# EAGLE board TEST1 (EAGLE 6.0)
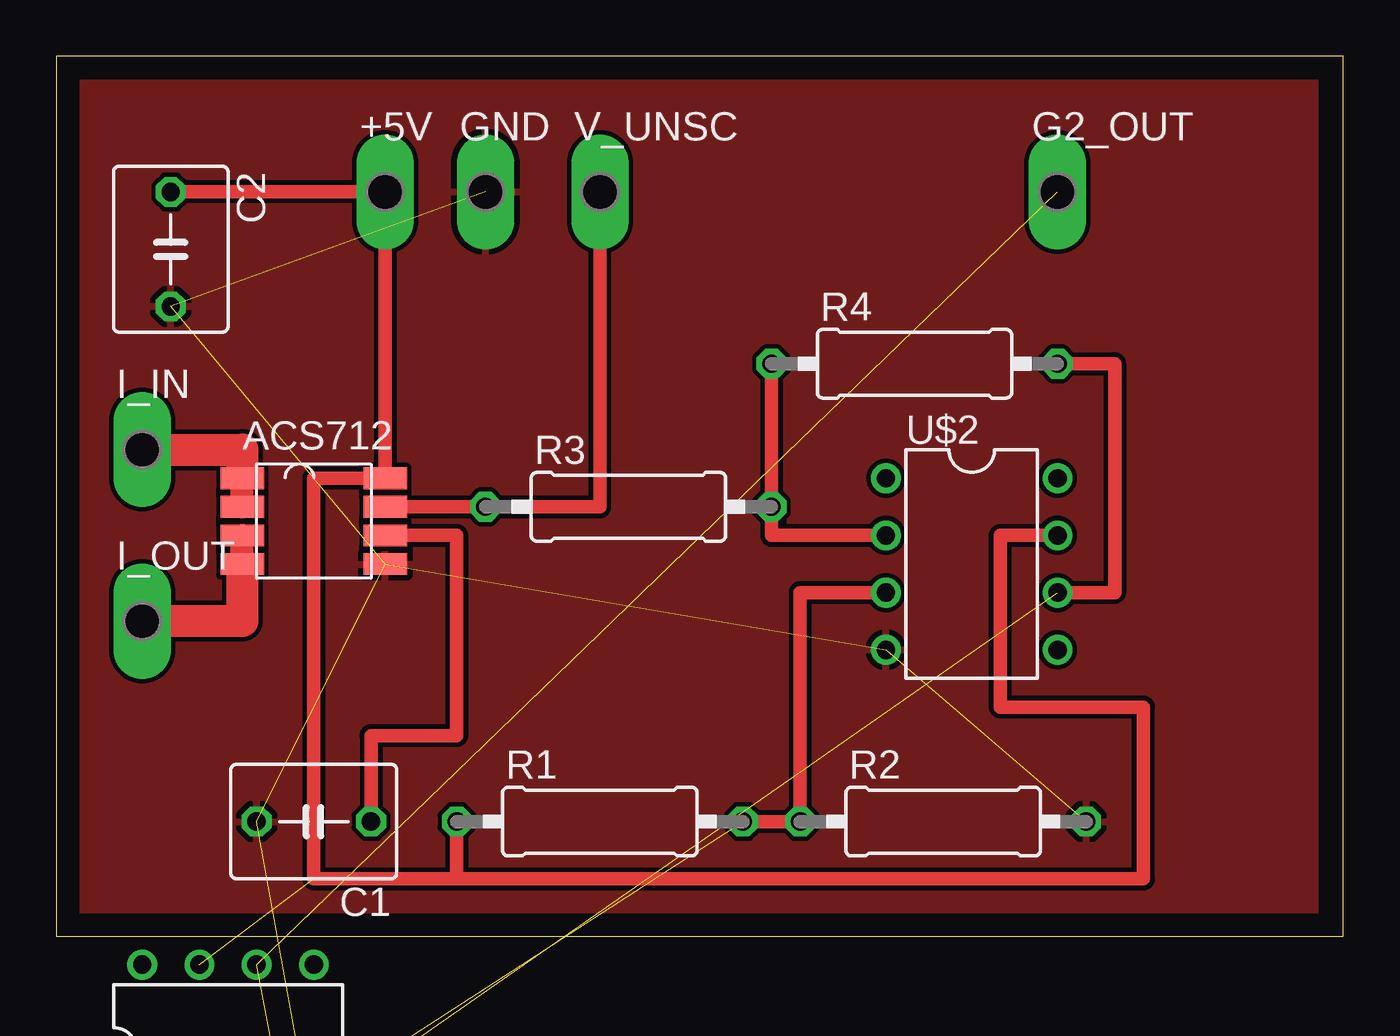
[diagram p0: board, top side]

Size 57.13 x 39.04 mm. Coordinates in mm from the lower left corner, seen from the top.
Outline: 0,0 57.13,0 57.13,39.04 0,39.04 0,0
Copper layers (1*16): Top 0.035mm / dielectric 1.5mm / Bottom 0.035mm
Design rules: minimum track width 10mil, minimum drill 24mil, track to track 8mil, track to pad 8mil, pad to pad 8mil, via to via 8mil, smd to smd 8mil, copper to edge 40mil, drill to drill 8mil, minimum pad ring 10mil, minimum via ring 8mil, stop-mask expansion 4mil, vias tented up to drill 0mil, thermal gap 10mil

## Footprints (pad centres in the part's own frame; a part is rotated, then mirrored left to right if it is on the bottom)
P1-17Y = drill 1.702 pad 2.121 long: TP 0,0
C050-050X075 = drill 0.813 octagon: 1 -2.54,0; 2 2.54,0
0309/12 = drill 0.813 octagon: 1 -6.35,0; 2 6.35,0
SOIC8 = smd 1.93 x 0.965: 1 -4.445,1.27; 2 -4.445,0; 3 -4.445,-1.27; 4 -4.445,-2.54; 5 1.905,-2.54; 6 1.905,-1.27; 7 1.905,0; 8 1.905,1.27
PDIP8 = drill 0.813 pad 1.27: 1 -3.81,-3.81; 2 -1.27,-3.81; 3 1.27,-3.81; 4 3.81,-3.81; 5 3.81,3.81; 6 1.27,3.81; 7 -1.27,3.81; 8 -3.81,3.81

## Placement (x,y rotation side)
+5V  TPPAD1-17Y  [P1-17Y]  14.61,33.02 0 top
C1  1n  [C050-050X075]  11.43,5.08 180 top
C2  100n  [C050-050X075]  5.08,30.48 270 top
G1_OUT  TPPAD1-17Y  [P1-17Y]  2.54,-13.97 0 top  (outside the outline)
G2_OUT  TPPAD1-17Y  [P1-17Y]  44.45,33.02 0 top
GND  TPPAD1-17Y  [P1-17Y]  19.05,33.02 0 top
I_IN  TPPAD1-17Y  [P1-17Y]  3.81,21.59 0 top
I_OUT  TPPAD1-17Y  [P1-17Y]  3.81,13.97 0 top
R1  1k  [0309/12]  24.13,5.08 0 top
R2  1k  [0309/12]  39.37,5.08 0 top
R3  1k  [0309/12]  25.4,19.05 0 top
R4  1.5k  [0309/12]  38.1,25.4 0 top
R5  2k  [0309/12]  7.62,-21.59 0 top  (outside the outline)
R6  1k  [0309/12]  7.62,-27.94 0 top  (outside the outline)
U$1  ACS712  [SOIC8]  12.7,19.05 0 top
U$2  MCP601  [PDIP8]  40.64,16.51 270 top
U$3  MCP601  [PDIP8]  7.62,-5.08 0 top
V_UNSC  TPPAD1-17Y  [P1-17Y]  24.13,33.02 0 top

## Library data of the parts
+5V G1_OUT G2_OUT GND I_IN I_OUT V_UNSC = testpad
C1 C2 R1-R6 = resistor
U$1-U$3 = Pauls_parts

## Nets
+2.5V: R1.2 R2.1 U$2.3 U$3.3
+5V: +5V.TP C2.1 R1.1 U$1.8 U$2.7 U$3.7
G1_OUT: G1_OUT.TP R4.2 R5.1 U$2.6
G2_OUT: G2_OUT.TP R6.2 U$3.6
GND: C1.2 C2.2 GND.TP R2.2 U$1.5 U$2.4 U$3.4
I_IN: I_IN.TP U$1.1 U$1.2
I_OUT: I_OUT.TP U$1.3 U$1.4
N$1: R3.1 U$1.7 V_UNSC.TP
N$2: R3.2 R4.1 U$2.2
N$4: R5.2 R6.1 U$3.2
N$8: C1.1 U$1.6

## Tracks (layer width: path | path; a pad name or v marks a point on that pad's centre or on a via)
+2.5V  (1 unrouted)
  Top 0.61: U$2.3 33.02,15.24 R2.1 R1.2
+5V  (1 unrouted)
  Top 0.61: C2.1 +5V.TP U$1.8 11.43,20.32 11.43,2.54 17.78,2.54 | R1.1 17.78,2.54 | 17.78,2.54 48.26,2.54 48.26,10.16 41.91,10.16 41.91,17.78 U$2.7
G1_OUT  (2 unrouted)
  Top 0.61: R4.2 46.99,25.4 46.99,15.24 U$2.6
G2_OUT  (2 unrouted)
GND  (6 unrouted)
  pour Top: 0,38.1 55.88,38.1 55.88,0 0,0
I_IN
  Top 1.016: U$1.2 U$1.1
  Top 1.422: I_IN.TP 8.26,21.59 U$1.1
I_OUT
  Top 1.016: U$1.4 U$1.3
  Top 1.422: U$1.4 8.26,13.97 I_OUT.TP
N$1
  Top 0.61: U$1.7 R3.1 24.13,19.05 V_UNSC.TP
N$2
  Top 0.61: R4.1 R3.2 31.75,17.78 U$2.2
N$4  (2 unrouted)
N$8
  Top 0.61: U$1.6 17.78,17.78 17.78,8.89 13.97,8.89 C1.1